# Altium PCB 串口版第三版.PcbDoc
Units mil, origin at the board's own origin, x right, y up, seen from the top; angles counter-clockwise.
Board outline 535 x 839 mil, 2 copper layers (Top Layer, Bottom Layer); 13 components, 16 nets, 58 pads, 0 vias.
Unrouted connection lines stored in the file: 31.
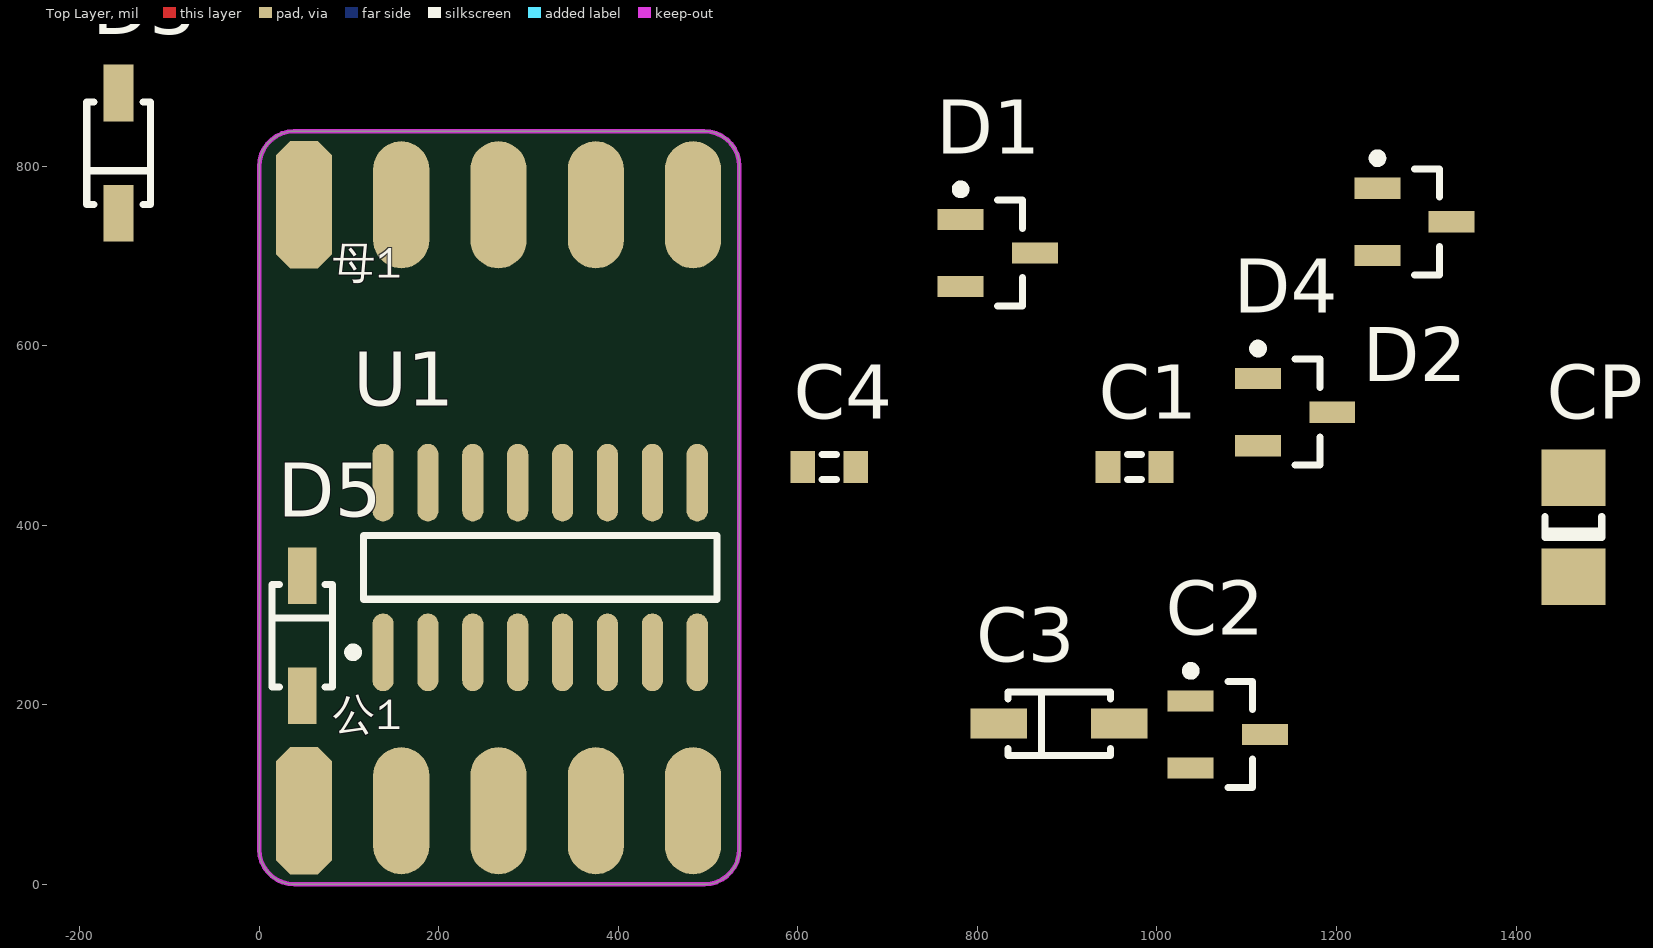
[diagram p0: Top Layer view]
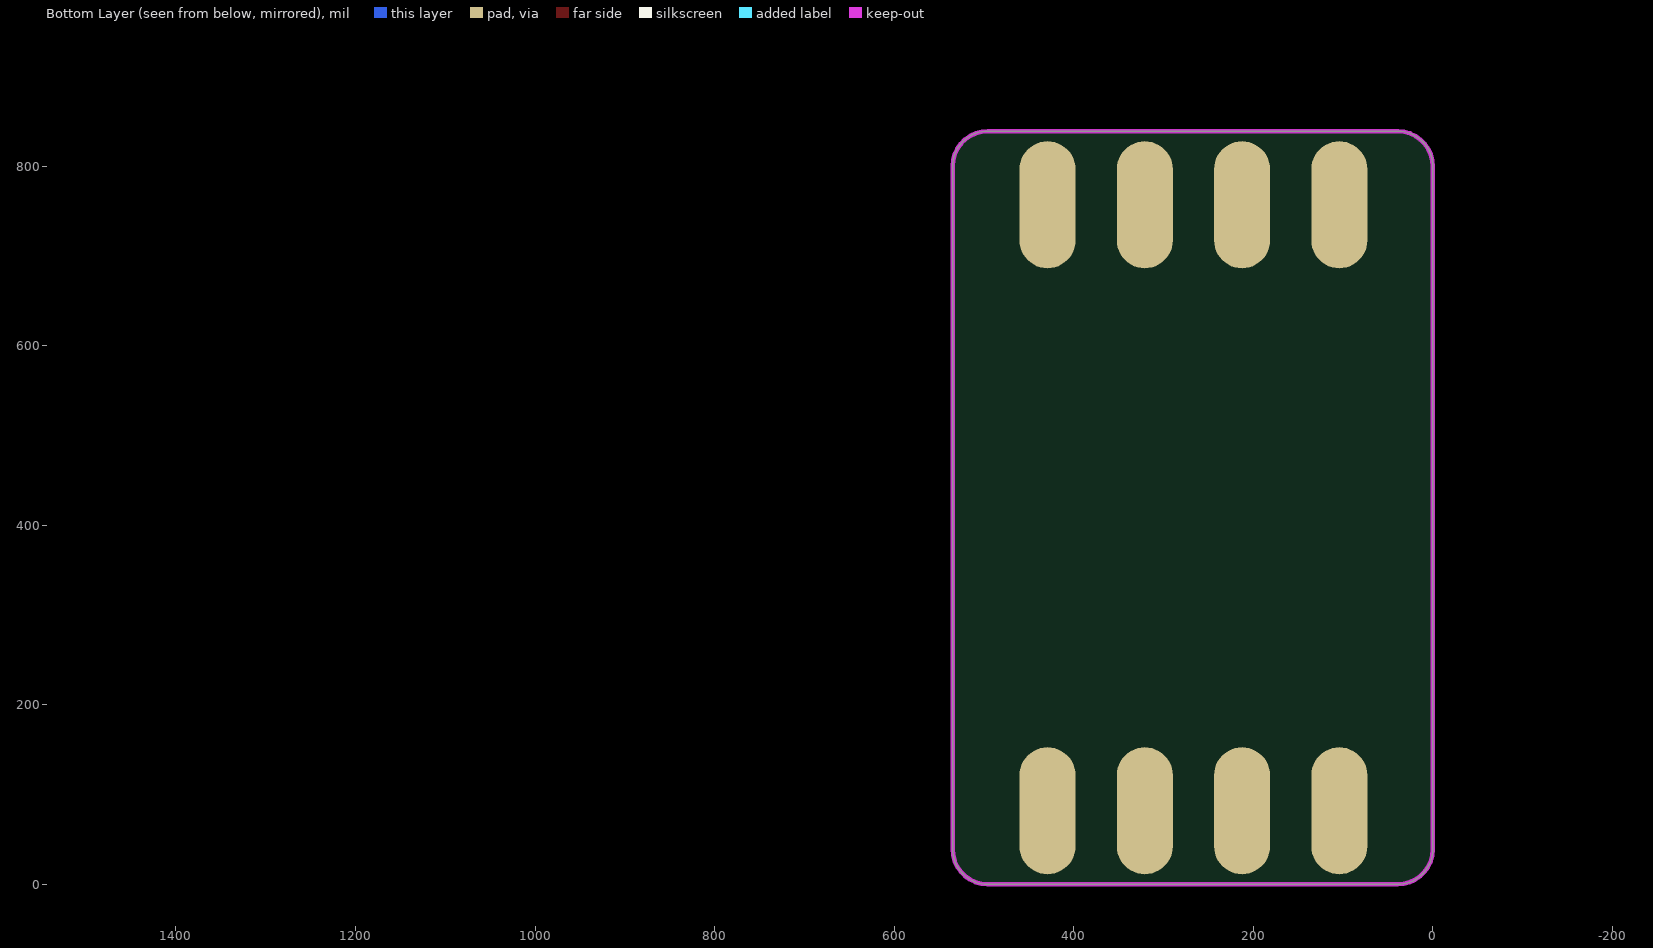
[diagram p1: Bottom Layer view, seen from below]

## Layer stack, top to bottom
Top Layer: signal copper 1.4
Dielectric: dielectric 12.6, FR-4, Dk 4.8
Bottom Layer: signal copper 1.4

## Board outline
0,38.71 0,799.63 cw(c39.37,799.63) 38.71,838.99 38.71,839 495.63,839 cw(c495.63,799.63) 534.99,800.29 535,800.29 535,39.37 cw(c495.63,39.37) 496.29,0.01 496.29,0 39.37,0 cw(c39.37,39.37)

## Design rules (kind name [scope] priority, off if disabled: settings)
Clearance [All] p1: gap=8
PolygonConnect [All] p1: connectstyle=Relief reliefconductorwidth=10 reliefentries=4 polygonreliefangle="90 Angle"
RoomDefinition 串口板第5版 [InComponentClass('串口板第5版')] p1: confinementstyle=ConfineIn formatcopy=TRUE outline -206,-269 1513,-269 1513,937 -206,937
RoutingVias [All] p1: holewidth=18 width=32 viastyle="Through Hole" minholewidth=15 minwidth=30 maxholewidth=28 maxwidth=50
SilkscreenOverComponentPads [All] p1: minsilkscreentomaskgap=10
SolderMaskExpansion [All] p1: expansion=4
Width [All] p1: maxlimit=100 minlimit=6 preferedwidth=10
27 further rules are at their usual default settings.

## Components (designator, comment, footprint, x,y, rotation, side; value= is the part's Value field where it differs from the comment)
C1 "0.1uF" 0603R 975,465 r0 top
C2 "0.1uF" SOT23_N 1079,167 r0 top
C3 "0.1uF" 425 891,179 r0 top
C4 "0.1uF" 0603R 635,465 r0 top
CP1 "10uF/16V" 3216[1206] 1464,398 r90 top
D1 "BAT54S" SOT23_N 822.74,703.29 r0 top
D2 "BAT54S" SOT23_N 1287,738 r0 top
D3 "MMSZ51T1" 425 -156.63,814.57 r90 top
D4 "BAT54S" SOT23_N 1154,526 r0 top
D5 "IN4148W" SOD123 48,277 r90 top
U1 "MAX232ESE" SOIC16_N 313,353 r90 top
公1 "DB9" DB9BSM 50,82 r0 top
母1 "DB9" DB9BSM 50,757 r0 top (schematic designator ĸ1)

## Footprints (in the part's own frame and the unit in brackets; to place one, negate y for a bottom-side part, rotate by r counter-clockwise, add the part's x,y. Pads: shape width x height; smd on the part's side, far side on the other; paste and mask are expansions set on the pad)
425 [mm] "SOD-123; 2 Leads; Body 2.7 x 1.6 mm, ("
  rect 1.6x0.85 smd: 1(-1.7,0) 2(1.7,0)
  silkscreen extent -1.45,-0.9 1.45,0.9
0603R [mm]
  rect 0.7x0.9 smd: 1(-0.75,0) 2(0.75,0)
  silkscreen extent -0.2,-0.35 0.2,0.35, body extent -0.77,-0.42 0.78,0.43, height 0.45
3216[1206] [mm]
  rect 1.6x1.8 smd: 1(-1.4,0) 2(1.4,0)
  silkscreen extent -0.3,-0.8 0.3,0.8, body extent -2.1,-0.9 2.1,0.9, height 0.95
DB9BSM [mil]
  oct 62.5x141.67 smd: 1(0,0)
  oval 62.5x141.67 smd: 2(108.33,0) 3(216.67,0) 4(325,0) 5(433.33,0)
  oval 62.5x141.67 smd far side: 6(54.17,0) 7(162.5,0) 8(270.83,0) 9(379.17,0)
SOD123 [mm] "SOD-123; 2 Leads; Body 2.7 x 1.6 mm, ("
  rect 1.6x0.8 smd: 1(-1.7,0) 2(1.7,0)
  silkscreen extent -1.45,-0.85 1.45,0.85
SOIC16_N [mm] "SOIC, 16-Leads, Body 9.9x3.9mm, Pitch 1.27mm, IPC Medium Den"
  oval 2.2x0.6 smd: 1(-2.4,4.445) 2(-2.4,3.175) 3(-2.4,1.905) 4(-2.4,0.635) 5(-2.4,-0.635) 6(-2.4,-1.905) 7(-2.4,-3.175) 8(-2.4,-4.445) 9(2.4,-4.445) 10(2.4,-3.175) 11(2.4,-1.905) 12(2.4,-0.635) 13(2.4,0.635) 14(2.4,1.905) 15(2.4,3.175) 16(2.4,4.445)
  silkscreen extent -2.52,-5 0.9,5.42, body extent -2,-5 2,5, height 1.91
SOT23_N [mm] "SOT23, 3-Leads, Body 2.9x1.3mm, Pitch 0.95mm, Lead Span 2.3mm, IPC Medium Den"
  rect 1.3x0.6 smd: 1(-1.05,0.95) 2(-1.05,-0.95) 3(1.05,0)
  silkscreen extent -1.17,-1.5 0.7,1.92, body extent -0.7,-1.5 0.7,1.5, height 1.1

## Part data
C1 C4: library part CAP, "Capac"
C2 C3: library part CAP, "Capacitor"
CP1: library part CAPACITOR, "Tantalum Capac"
D1 D2 D4: "Schottky Barrier Double Diode"
D3: "Surface Mount Silicon Zener Diode"
D5: library part DIODE, "DIODE"
U1: "+5V Powered, Multi-Channel RS-232 Driver/Receiver"

## Nets (pads, with @x,y where several pads share a name; then routed paths per layer and width w, separated by ;. In a path a pad name is that pad's centre, name@x,y a point inside that pad or via, vN(x,y) a via of type N, cw(c..) or ccw(c..) an arc to the next point about the centre after c; other vN are vias at no path point)
GND: C3.2 CP1.2 D1.1 D2.1 D3.2 D4.1 U1.15 公1.5
NetC1_1: C1.1 U1.1
NetC1_2: C1.2 U1.3
NetC2_1: C2.1 U1.2
NetC4_1: C4.1 U1.4
NetC4_2: C4.2 U1.5
NetC5_2: U1.6
NetD1_3: D1.3 母1.4 母1.6
NetD2_3: D2.3 母1.7 母1.8
NetD4_3: D4.3 母1.5
RX: U1.14 母1.1 母1.2
RXD0: U1.12 公1.4
TX: U1.13 母1.3
TXD0: U1.11 公1.6
VCC5V: D5.1 公1.1
VDD5V: C2.2 C3.1 CP1.1 D1.2 D2.2 D3.1 D4.2 D5.2 U1.16
pads on no net: C2.3 U1.7 U1.8 U1.9 U1.10 公1.2 公1.3 公1.7 公1.8 公1.9 母1.9

## Keep-outs
Keep-Out Layer:
  the board outline again, w5